# Altium PCB 大功率步进电机驱动器.PCBDOC
Units mm, origin at the board's own origin, x right, y up, seen from the top; angles counter-clockwise.
Board outline 152.4 x 101.6 mm, 2 copper layers (Top Layer, Bottom Layer); 33 components, 26 nets, 96 pads, 9 vias.
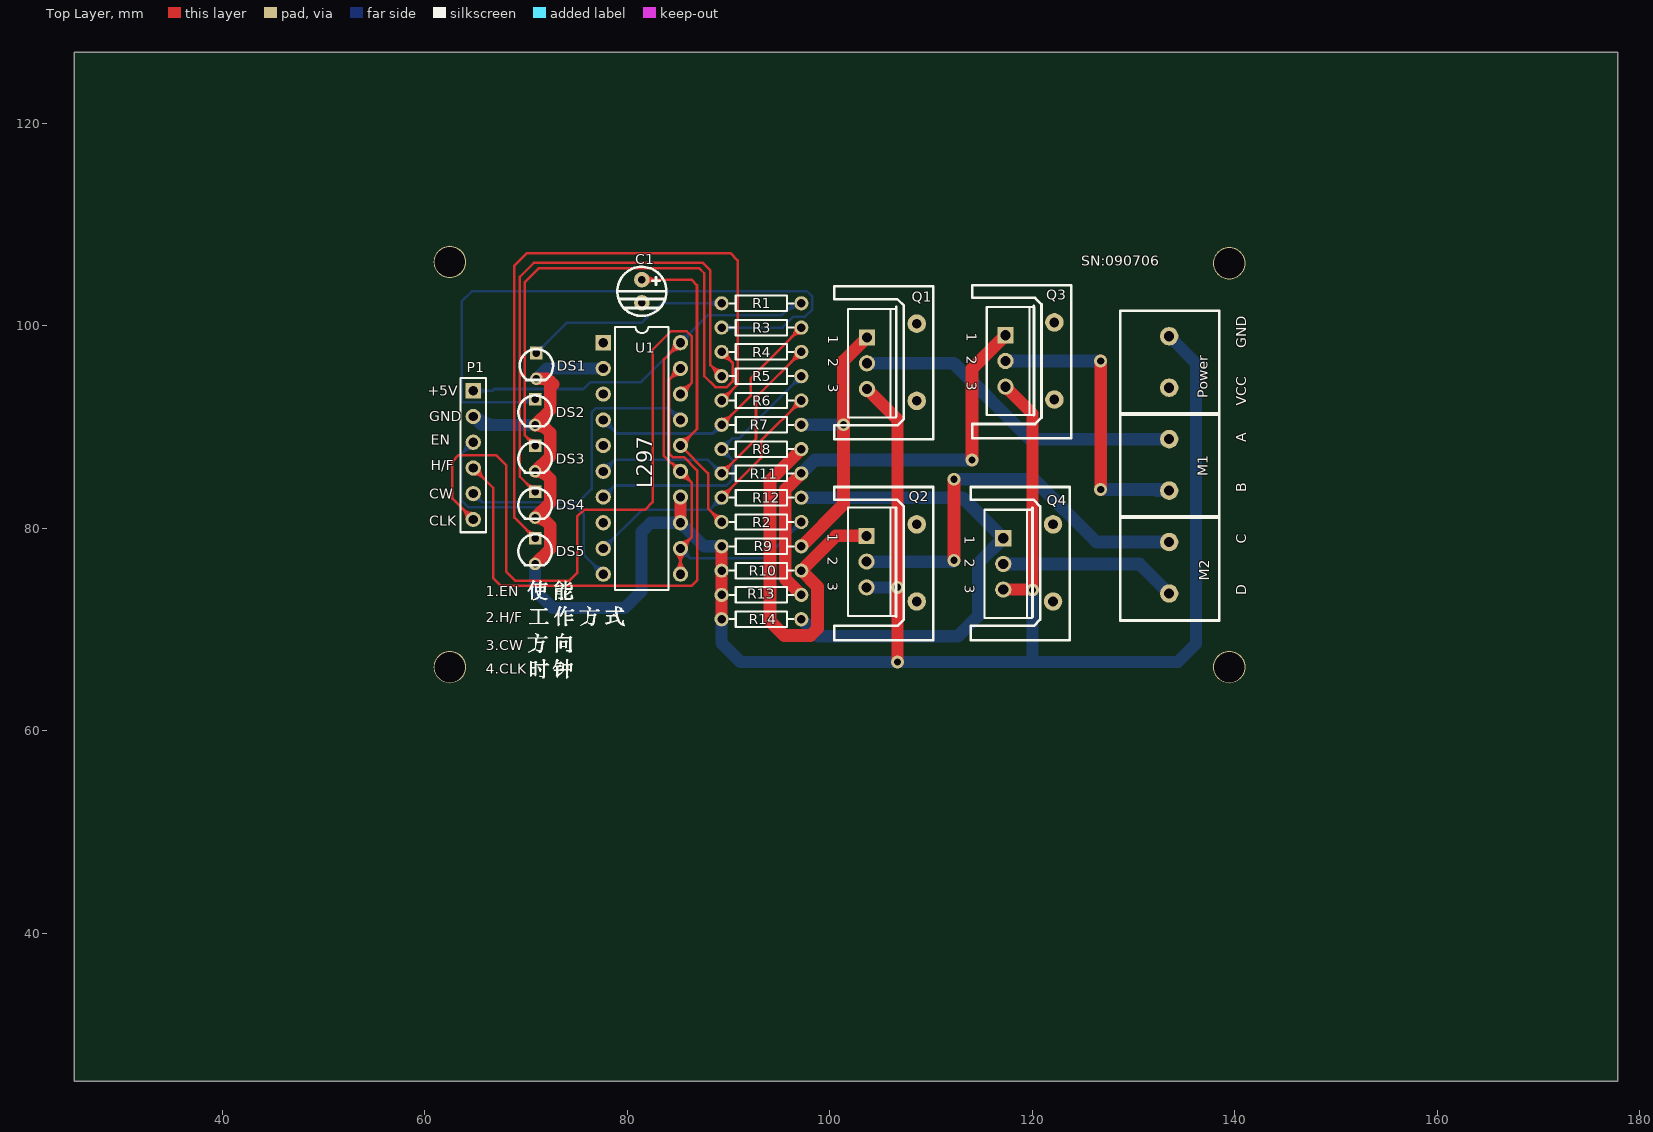
[diagram p0: Top Layer view]
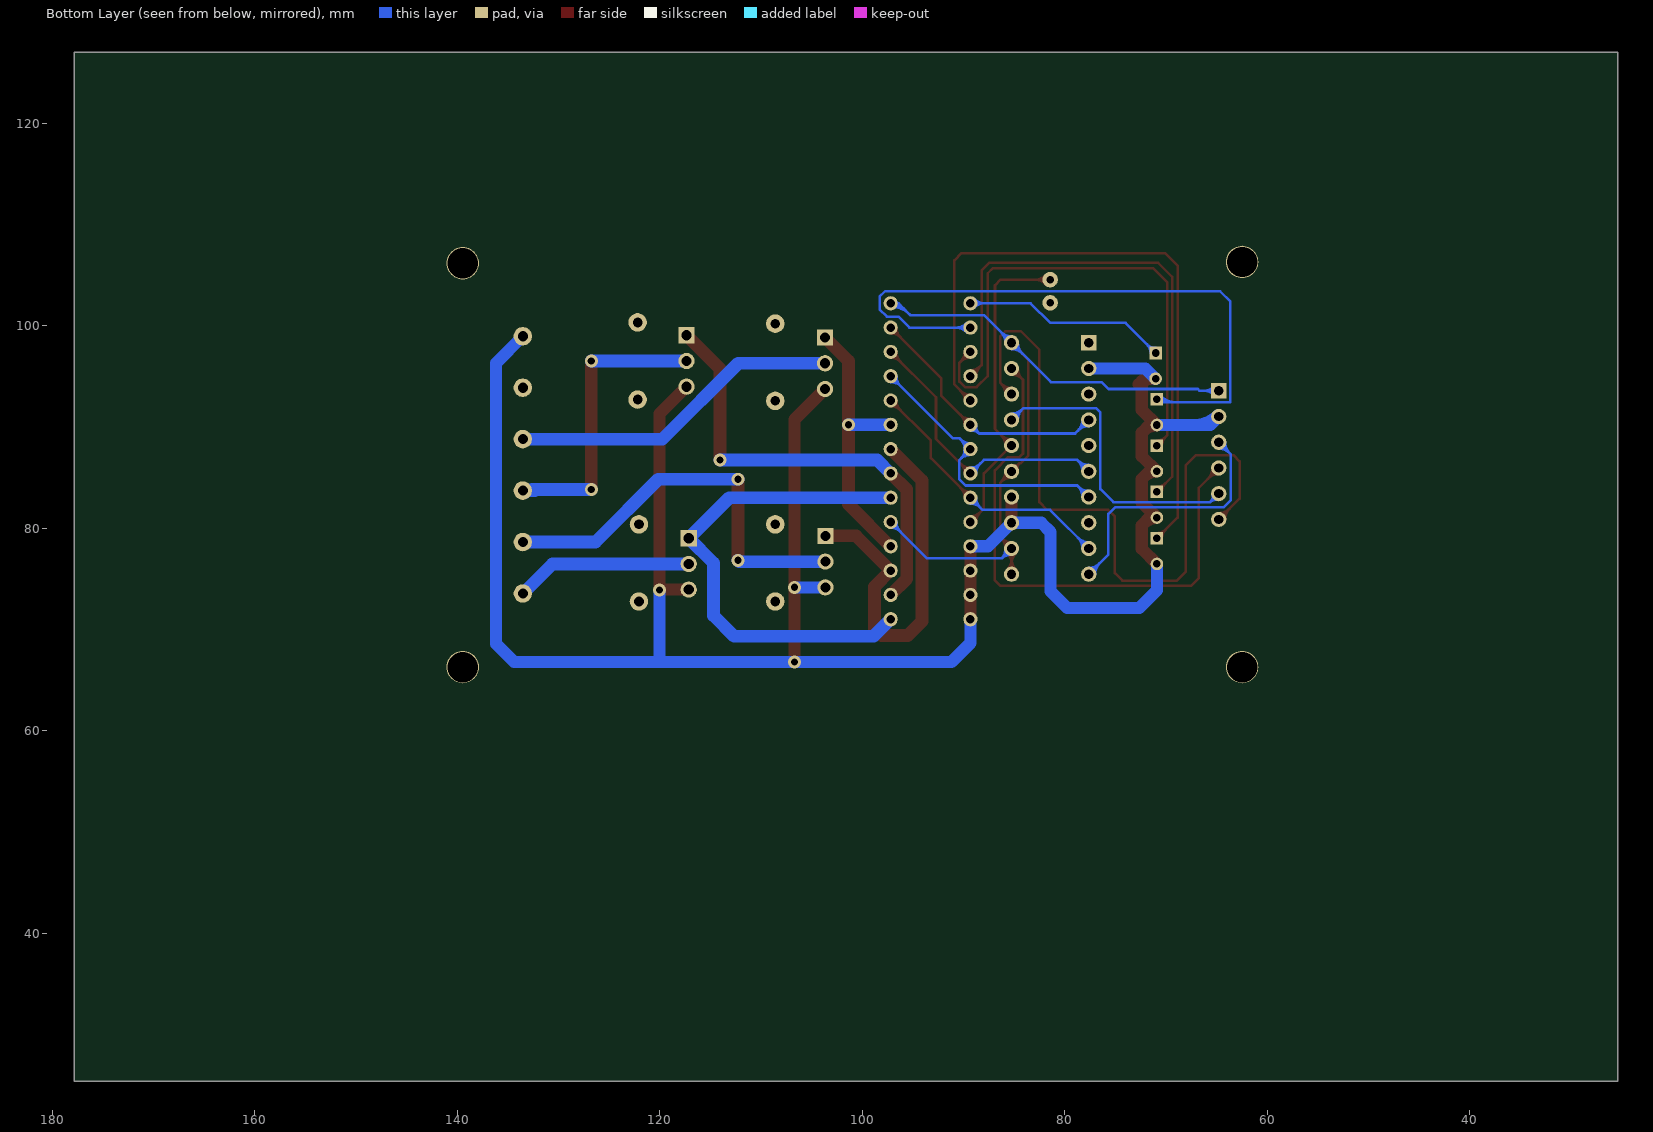
[diagram p1: Bottom Layer view, seen from below]

## Layer stack, top to bottom
Top Layer: signal copper 0.0356
Dielectric: dielectric 0.32, FR-4, Dk 4.8
Bottom Layer: signal copper 0.0356

## Board outline
25.4,25.4 177.8,25.4 177.8,127 25.4,127

## Design rules (kind name [scope] priority, off if disabled: settings)
Clearance [All] p1: gap=0.254
ComponentClearance [All] p1: gap=0.254 collisioncheckmode=3
PolygonConnect [All] p1: connectstyle=Relief reliefconductorwidth=0.254 reliefentries=4 polygonreliefangle="90 Angle"
RoutingVias [All] p1: holewidth=0.711 width=1.27 viastyle="Through Hole" minholewidth=0.711 minwidth=1.27 maxholewidth=0.711 maxwidth=1.27
SolderMaskExpansion [All] p1: expansion=0.102
TestPointUsage [All] p1: valid=0 allowmultiple=FALSE
Testpoint [All] p1: side=15 testpointundercomponent=TRUE minsize=1.016 maxsize=2.54 preferedsize=1.524 minholesize=0 maxholesize=1.016 preferedholesize=0.813 testpointgrid=0.025 style=1023 order=1234567890
Width Width_9 [InNet('NetQ4_1')] p1: maxlimit=1.254 minlimit=1.254 preferedwidth=1.254
Width Width_8 [InNet('NetQ3_1')] p2: maxlimit=1.254 minlimit=1.254 preferedwidth=1.254
Width Width_7 [InNet('NetQ2_1')] p3: maxlimit=1.254 minlimit=1.254 preferedwidth=1.254
Width Width_6 [InNet('NetQ1_1')] p4: maxlimit=1.254 minlimit=1.254 preferedwidth=1.254
Width Width_5 [InNet('NetM2_2')] p5: maxlimit=1.254 minlimit=1.254 preferedwidth=1.254
Width Width_4 [InNet('NetM2_1')] p6: maxlimit=1.254 minlimit=1.254 preferedwidth=1.254
Width Width_3 [InNet('NetM1_2')] p7: maxlimit=1.254 minlimit=1.254 preferedwidth=1.254
Width Width_2 [InNet('NetM1_1')] p8: maxlimit=1.254 minlimit=1.254 preferedwidth=1.254
Width Width_1 [InNet('GND')] p9: maxlimit=1.2 minlimit=1.2 preferedwidth=1.2
Width [All] p10: maxlimit=0.254 minlimit=0.254 preferedwidth=0.254
17 further rules are at their usual default settings.

## Classes and differential pairs
component class 步进电机控制器: C1 C6 DS1 DS2 DS3 DS4 DS5 M1 M2 P1 Power Q1 Q2 Q3 Q4 R1 R2 R3 R4 R5 R6 R7 R8 R9 R10 R11 R12 R13 R14 U1 U2

## Components (designator, comment, footprint, x,y, rotation, side; value= is the part's Value field where it differs from the comment)
C1 "" C-DJ-4 78.902,102.135 r270 top
DS1 "LED" LED_D 72.552,95.531 r270 top
DS2 "LED" LED_D 72.425,90.959 r270 top
DS3 "LED" LED_D 72.425,86.387 r270 top
DS4 "LED" LED_D 72.425,81.815 r270 top
DS5 "LED" LED_D 72.425,77.243 r270 top
M1 "" JK128_2 134.655,88.292 r0 top
M2 "" JK128_2 134.655,78.132 r0 top
P1 "PZ_6" HDR-6 63.662,87.403 r270 top
Power "" JK128_2 134.655,98.452 r0 top (schematic designator "Power 1")
Q1 "NMOS-2" SFM-T3/A4.7V 103.667,96.293 r270 top
Q2 "NMOS-2" SFM-T3/A4.7V 103.632,76.708 r270 top
Q3 "NMOS-2" SFM-T3/A4.7V 117.348,96.52 r270 top
Q4 "NMOS-2" SFM-T3/A4.7V 117.129,76.481 r270 top
R1 "Res" RSE 93.253,102.217 r180 top
R2 "Res" RSE 93.253,80.619 r0 top
R3 "Res" RSE 93.253,99.817 r180 top
R4 "Res" RSE 93.253,97.417 r180 top
R5 "Res" RSE 93.253,95.018 r180 top
R6 "Res" RSE 93.253,92.618 r180 top
R7 "Res" RSE 93.253,90.218 r180 top
R8 "Res" RSE 93.253,87.818 r180 top
R9 "Res" RSE 93.253,78.219 r180 top
R10 "Res" RSE 93.253,75.82 r180 top
R11 "Res" RSE 93.253,85.419 r180 top
R12 "Res" RSE 93.253,83.019 r180 top
R13 "Res" RSE 93.253,73.42 r180 top
R14 "Res" RSE 93.253,71.02 r180 top
U1 "L297A" DIP-20 81.442,86.895 r270 top
? "Comment" SRP 118.237,76.581 r270 top
? "Comment" SRP 104.775,76.581 r270 top
? "Comment" SRP 118.364,96.52 r270 top
? "Comment" SRP 104.775,96.393 r270 top

## Footprints (in the part's own frame and the unit in brackets; to place one, negate y for a bottom-side part, rotate by r counter-clockwise, add the part's x,y. Pads: shape width x height; smd on the part's side, far side on the other; paste and mask are expansions set on the pad)
C-DJ-4 [mil] "电容4mm"
  round 60 hole 30: 1(-95,100) 2(-5,100)
  silkscreen extent -145,5 46,196
DIP-20 [mm] "直插20管脚"
  rect 1.5x1.5 hole 0.9: 1(-11.43,-3.81)
  round 1.5 hole 0.9: 2(-8.89,-3.81) 3(-6.35,-3.81) 4(-3.81,-3.81) 5(-1.27,-3.81) 6(1.27,-3.81) 7(3.81,-3.81) 8(6.35,-3.81) 9(8.89,-3.81) 10(11.43,-3.81) 11(11.43,3.81) 12(8.89,3.81) 13(6.35,3.81) 14(3.81,3.81) 15(1.27,3.81) 16(-1.27,3.81) 17(-3.81,3.81) 18(-6.35,3.81) 19(-8.89,3.81) 20(-11.43,3.81)
  silkscreen extent -13,-2.65 13,2.65
HDR-6 [mm] "6排针"
  rect 1.5x1.5 hole 0.9: 1(-6.175,1.133)
  round 1.5 hole 0.9: 2(-3.635,1.133) 3(-1.095,1.133) 4(1.445,1.133) 5(3.985,1.133) 6(6.525,1.133)
  silkscreen extent -7.45,-0.14 7.79,2.4
JK128_2 [mil] "接线端子"
  round 71.81 hole 39.37: 1(-45,20) 2(-45,-180)
  silkscreen extent -235,-285 150,120
LED_D [mm] "发光二极管_3mm"
  rect 1.25x1.25 hole 0.75: 1(-1.778,-1.524)
  round 1.25 hole 0.75: 2(0.762,-1.524)
  silkscreen extent -2.16,-3.17 0.89,0.13
RSE [mm] "直插电阻1/8W"
  round 1.4 hole 0.85: 1(-3.937,0) 2(3.937,0)
  silkscreen extent -3.18,-0.76 3.17,0.76
SFM-T3/A4.7V [mm] "TO, Thru-Hole, Vertical, Heatsink Mounted; 3 In-Line Leads; Pitch 2.54 mm"
  rect 1.6x1.6 hole 1: 1(-2.54,0)
  round 1.6 hole 1: 2(0,0) 3(2.54,0)
  silkscreen extent -5.35,-1.85 5.35,2.85
SRP [mm] "散热片78XX"
  round 1.824 hole 0.962: 0(-3.81,3.81) 0(3.81,3.81)
  silkscreen extent -7.49,-4.32 7.62,5.46

## Part data
C1: library part Cap, "Capacitor"
DS1 DS2 DS3 DS4 DS5: "发光二极管"
M1 M2 Power: library part MHDR1X2, "Header, 2-Pin"
P1: "排针——6"
Q1 Q2 Q3 Q4: "N-Channel Power MOSFET"
R1 R2 R3 R4 R5 R6 R7 R8 R9 R10 R11 R12 R13 R14: "电阻"
U1: "Stepper Motor Controller"

## Free pads (board coordinates)
  round 3.2 hole 3: 0(62.484,66.294) 0(62.484,106.299) 0(139.446,66.294) 0(139.446,106.172)

## Via types
v1: diameter 1.27, hole 0.711, Top Layer to Bottom Layer, 9 vias

## Nets (pads, with @x,y where several pads share a name; then routed paths per layer and width w, separated by ;. In a path a pad name is that pad's centre, name@x,y a point inside that pad or via, vN(x,y) a via of type N, cw(c..) or ccw(c..) an arc to the next point about the centre after c; other vN are vias at no path point)
+5V: P1.1 R1.1 R2.2 U1.11 U1.12 U1.15 U1.20 | length 118.6
  Top Layer w0.254: U1.20@84.629,98.325 cw(c83.125,98.325) 84.188,97.262 cw(c85.252,96.198) U1.20@85.252,97.702 ; U1.15@84.644,85.761 ccw(c83.941,85.918) 84.45,86.427 ; U1.11@84.811,75.906 ccw(c83.748,76.969) 85.252,76.969 ccw(c86.756,76.969) U1.11@85.692,75.906 ; U1.12@84.811,77.564 cw(c83.748,76.501) 85.252,76.501 cw(c86.756,76.501) U1.12@85.692,77.564 ; U1.20@84.883,98.325 cw(c83.992,98.325) 84.622,97.695 cw(c85.252,97.065) U1.20@85.252,97.956 ; U1.11@84.991,75.726 ccw(c84.361,76.356) 85.252,76.356 ccw(c86.143,76.356) U1.11@85.513,75.726 ; U1.12@84.991,77.744 cw(c84.361,77.114) 85.252,77.114 cw(c86.143,77.114) U1.12@85.513,77.744 ; U1.15@85.116,86.233 cw(c84.959,86.935) 84.45,86.427 ; U1.11 U1.12 86.385,79.139 86.385,84.491 U1.15 84.45,86.427 ; U1.12@85.252,78.374 ccw(c85.252,79.265) 85.882,78.635 ccw(c86.512,78.005) U1.12@85.621,78.005 ; U1.12@85.252,78.628 ccw(c85.252,80.132) 86.315,79.069 ccw(c87.379,78.005) U1.12@85.875,78.005 ; U1.15@85.252,85.002 cw(c85.252,83.498) 86.315,84.562 cw(c87.379,85.625) U1.15@85.875,85.625 ; U1.15@85.252,85.256 cw(c85.252,84.365) 85.882,84.995 cw(c86.512,85.625) U1.15@85.621,85.625 ; U1.20 83.613,96.686 83.613,87.142 84.328,86.427 84.45,86.427
  Bottom Layer w0.254: P1.1 66.675,93.578 66.848,93.751 75.667,93.751 76.352,94.437 81.364,94.437 U1.20 87.942,101.016 95.21,101.016 96.411,102.217 R1.1 ; P1.1@65.056,93.317 cw(c65.686,92.687) 65.686,93.578 cw(c65.686,94.469) P1.1@65.056,93.839 ; P1.1@65.235,93.137 cw(c66.299,92.074) 66.299,93.578 cw(c66.299,95.082) P1.1@65.235,94.019 ; U1.20@84.629,98.325 cw(c83.125,98.325) 84.188,97.262 cw(c85.252,96.198) U1.20@85.252,97.702 ; U1.20@84.883,98.325 cw(c83.992,98.325) 84.622,97.695 cw(c85.252,97.065) U1.20@85.252,97.956 ; U1.12 86.219,77.038 ; U1.20@85.252,98.694 ccw(c85.252,99.585) 85.882,98.955 ccw(c86.512,98.325) U1.20@85.621,98.325 ; U1.20@85.252,98.948 ccw(c85.252,100.452) 86.315,99.389 ccw(c87.379,98.325) U1.20@85.875,98.325 ; U1.12@85.277,77.637 cw(c85.326,76.935) 85.824,77.432 cw(c86.322,77.93) U1.12@85.62,77.979 ; U1.12@85.295,77.384 cw(c85.378,76.198) 86.218,77.038 ; U1.12@85.873,77.962 ccw(c87.059,77.879) 86.218,77.038 ; 95.316,101.122 cw(c97.19,99.249) R1.1@97.19,101.898 ; 95.75,101.555 cw(c97.19,100.116) R1.1@97.19,102.152 ; 96.184,101.989 cw(c97.19,100.983) R1.1@97.19,102.406 ; R2.2@96.617,80.619 cw(c95.233,80.619) 96.212,79.641 cw(c97.19,78.663) R2.2@97.19,80.046 ; R1.1@96.643,102.047 ccw(c96.411,101.975) 96.411,102.217 ccw(c96.411,102.459) R1.1@96.643,102.387 ; R2.2@96.871,80.619 cw(c96.101,80.619) 96.645,80.074 cw(c97.19,79.53) R2.2@97.19,80.3 ; R2.2 93.609,77.038 86.219,77.038
GND: DS1.2 DS2.2 DS3.2 DS4.2 DS5.2 P1.2 Power.1 Q1.3 Q2.3 Q3.3 Q4.3 R9.2 R10.2 R13.2 R14.2 U1.2 U1.13 U1.14 | length 237.3
  Top Layer w1.2: DS5.2 72.39,77.97 72.39,80.291 71.628,81.053 DS4.2 72.39,82.542 72.39,84.863 71.628,85.625 DS3.2 72.39,87.114 72.39,89.435 71.628,90.197 DS2.2 72.39,91.686 72.39,94.515 72.136,94.769 DS1.2 ; DS4.2@70.901,81.028 cw(c70.901,79.212) 72.185,80.496 ; DS3.2@70.901,85.6 cw(c70.901,83.784) 72.185,85.068 ; DS2.2@70.901,90.172 cw(c70.901,88.356) 72.185,89.64 ; DS4.2@70.905,81.028 cw(c71.125,79.823) 71.992,80.689 ; DS3.2@70.905,85.6 cw(c71.125,84.395) 71.992,85.261 ; DS2.2@70.905,90.172 cw(c71.125,88.967) 71.992,89.833 ; DS1.2@71.032,94.744 cw(c71.348,92.873) 72.69,94.215 ; U1.13 U1.14 ; R13.2 R14.2 R10.2 R9.2 ; Q1.3 106.68,90.74 v1(106.68,66.802) ; v1@106.553,74.168 v1@106.68,74.295 ; Q4.3 119.988,73.941 v1(120.015,73.914) 120.015,91.313 Q3.3
  Bottom Layer w1.2: P1.2 65.636,90.197 DS2.2 ; P1.2@64.901,91.144 ccw(c67.187,93.43) 67.187,90.197 ; DS5.2 70.901,73.879 72.644,72.136 79.756,72.136 81.407,73.787 81.407,79.629 82.323,80.545 U1.13 87.577,78.219 R9.2 ; DS1.2 72.044,95.785 U1.2 ; R14.2 89.316,68.672 91.186,66.802 134.366,66.802 136.144,68.58 136.144,96.328 Power.1 ; Q2.3 v1(106.68,74.168) ; 120.015,66.802 v1(120.015,73.914)
GND-12: C1.2
NetC1_1: C1.1 R2.1 U1.16 | length 42.4
  Top Layer w0.254: C1.1 86.333,104.548 86.891,103.99 86.891,89.804 U1.16 87.986,85.431 87.986,81.949 R2.1 ; C1.1@81.711,104.279 cw(c82.362,103.628) 82.362,104.548 cw(c82.362,105.468) C1.1@81.711,104.817 ; C1.1@81.891,104.099 cw(c82.975,103.015) 82.975,104.548 cw(c82.975,106.081) C1.1@81.891,104.997 ; U1.16@85.252,88.534 ccw(c85.252,89.425) 85.882,88.795 ccw(c86.512,88.165) U1.16@85.621,88.165 ; U1.16@85.252,88.788 ccw(c85.252,90.292) 86.315,89.229 ccw(c87.379,88.165) U1.16@85.875,88.165 ; R2.1@88.743,80.619 ccw(c87.359,80.619) 88.338,81.597 ccw(c89.316,82.575) R2.1@89.316,81.192 ; R2.1@88.997,80.619 ccw(c88.227,80.619) 88.771,81.164 ccw(c89.316,81.708) R2.1@89.316,80.938
NetDS1_1: DS1.1 R1.2 | length 25.6
  Bottom Layer w0.254: DS1.1 73.998,100.279 81.425,100.279 83.363,102.217 R1.2 ; DS1.1@71.028,97.807 ccw(c71.028,99.009) 71.878,98.159 ccw(c72.728,97.309) DS1.1@71.526,97.309 ; R1.2@88.911,101.812 ccw(c87.932,100.833) 87.932,102.217 ccw(c87.932,103.6) R1.2@88.911,102.622 ; R1.2@89.09,101.991 ccw(c88.546,101.447) 88.546,102.217 ccw(c88.546,102.987) R1.2@89.09,102.442
NetDS2_1: DS2.1 R3.2 | length 70.8
  Bottom Layer w0.254: 68.959,92.431 ccw(c68.959,94.679) DS2.1@70.549,93.089 ; 69.572,92.431 ccw(c69.572,94.066) DS2.1@70.728,92.91 ; 70.185,92.431 ccw(c70.185,93.453) DS2.1@70.908,92.73 ; DS2.1 70.594,92.431 63.652,92.431 63.652,102.387 64.67,103.405 97.738,103.405 98.273,102.87 98.273,101.6 97.571,100.898 96.428,100.898 95.347,99.817 R3.2 ; R3.2@89.541,99.591 cw(c90.086,99.047) 90.086,99.817 cw(c90.086,100.587) R3.2@89.541,100.043 ; R3.2@89.721,99.412 cw(c90.699,98.434) 90.699,99.817 cw(c90.699,101.2) R3.2@89.721,100.222
NetDS3_1: DS3.1 R4.2 | length 57.3
  Top Layer w0.254: DS3.1@70.403,88.165 ccw(c69.2,88.165) 70.051,89.015 ccw(c70.901,89.865) DS3.1@70.901,88.663 ; DS3.1 69.895,89.171 69.895,104.312 71.274,105.691 87.095,105.691 87.605,105.181 87.605,95.021 88.697,93.929 89.84,93.929 90.399,94.488 90.399,96.334 R4.2 ; R4.2@89.316,96.844 cw(c89.316,95.461) 90.294,96.439 cw(c91.272,97.417) R4.2@89.889,97.417 ; R4.2@89.316,97.098 cw(c89.316,96.328) 89.86,96.873 cw(c90.405,97.417) R4.2@89.635,97.417
NetDS4_1: DS4.1 R5.2 | length 57.7
  Top Layer w0.254: DS4.1@70.403,83.593 ccw(c69.2,83.593) 70.051,84.443 ccw(c70.901,85.293) DS4.1@70.901,84.091 ; DS4.1 69.387,85.107 69.387,104.82 70.766,106.199 87.476,106.199 88.214,105.461 88.214,96.119 R5.2 ; R5.2@88.743,95.018 ccw(c87.359,95.018) 88.338,95.996 ccw(c89.316,96.974) R5.2@89.316,95.591 ; R5.2@88.997,95.018 ccw(c88.227,95.018) 88.771,95.562 ccw(c89.316,96.107) R5.2@89.316,95.337
NetDS5_1: DS5.1 R6.2 | length 70.4
  Top Layer w0.254: DS5.1@70.403,79.021 ccw(c69.2,79.021) 70.051,79.871 ccw(c70.901,80.721) DS5.1@70.901,79.519 ; DS5.1 68.859,81.062 68.859,105.943 70.079,107.163 90.195,107.163 90.907,106.451 90.907,94.209 R6.2 ; R6.2@89.316,92.937 ccw(c89.316,93.707) 89.86,93.162 ccw(c90.405,92.618) R6.2@89.635,92.618 ; R6.2@89.316,93.191 ccw(c89.316,94.574) 90.294,93.596 ccw(c91.272,92.618) R6.2@89.889,92.618
NetM1_1: M1.1 Q1.2 | length 32.9
  Bottom Layer w1.254: Q1.2 112.241,96.293 119.734,88.8 M1.1
NetM1_2: M1.2 Q3.2 | length 30.5
  Top Layer w1.254: v1(126.746,83.82) v1(126.746,96.52)
  Bottom Layer w1.254: Q3.2 v1(126.746,96.52) ; v1(126.746,83.82) 132.236,83.82 132.336,83.72 M1.2 ; 132.582,83.82 cw(c132.582,82.791) 133.31,83.519 ccw(c132.582,82.791) 132.582,83.82
NetM2_1: M2.1 Q2.2 | length 40.5
  Top Layer w1.254: v1(112.268,76.835) v1(112.268,84.836)
  Bottom Layer w1.254: Q2.2 112.141,76.708 v1(112.268,76.835) ; v1(112.268,84.836) 120.142,84.836 126.338,78.64 M2.1
NetM2_2: M2.2 Q4.2 | length 17.6
  Bottom Layer w1.254: Q4.2 130.591,76.481 M2.2
NetQ1_1: Q1.1 R7.1 R9.1 | length 27.5
  Top Layer w1.254: R9.1 101.346,82.376 101.346,96.512 Q1.1
  Bottom Layer w1.254: R7.1 v1(101.346,90.218)
NetQ2_1: Q2.1 R8.1 R10.1 | length 38.1
  Top Layer w1.254: R8.1 94.098,84.726 94.098,70.825 95.504,69.418 98.095,69.418 98.781,70.104 98.781,74.229 R10.1 100.618,79.248 Q2.1
NetQ3_1: Q3.1 R11.1 R13.1 | length 44.4
  Top Layer w1.254: R13.1 95.606,75.004 95.606,83.834 R11.1 ; v1(114.046,86.741) 114.046,95.758 Q3.1
  Bottom Layer w1.254: R11.1 98.512,86.741 v1(114.046,86.741)
NetQ4_1: Q4.1 R12.1 R14.1 | length 49.3
  Bottom Layer w1.254: R14.1 98.868,69.342 112.649,69.342 114.681,71.374 114.681,76.573 Q4.1 113.131,83.019 R12.1
NetR3_1: R3.1 R7.2 U1.4 | length 37.8
  Top Layer w0.254: R7.2 92.202,93.104 92.202,94.829 R3.1 ; R7.2@89.316,90.537 ccw(c89.316,91.307) 89.86,90.763 ccw(c90.405,90.218) R7.2@89.635,90.218 ; R7.2@89.316,90.791 ccw(c89.316,92.174) 90.294,91.196 ccw(c91.272,90.218) R7.2@89.889,90.218 ; R3.1@96.617,99.817 cw(c95.233,99.817) 96.212,98.839 cw(c97.19,97.861) R3.1@97.19,99.244 ; R3.1@96.871,99.817 cw(c96.101,99.817) 96.645,99.272 cw(c97.19,98.728) R3.1@97.19,99.498
  Bottom Layer w0.254: U1.4@77.632,90.082 cw(c77.632,88.578) 78.695,89.642 cw(c79.759,90.705) U1.4@78.255,90.705 ; U1.4@77.632,90.336 cw(c77.632,89.445) 78.262,90.075 cw(c78.892,90.705) U1.4@78.001,90.705 ; U1.4 78.98,89.357 88.455,89.357 ; R7.2@88.745,90.164 cw(c87.743,90.069) 88.455,89.357 ; R7.2@89.262,89.648 ccw(c89.167,88.646) 88.455,89.357 ; R7.2 88.455,89.357
NetR4_1: R4.1 R11.2 U1.6 | length 41.9
  Top Layer w0.254: R11.2 92.71,88.813 92.71,92.938 R4.1 ; R11.2@89.316,85.738 ccw(c89.316,86.508) 89.86,85.963 ccw(c90.405,85.419) R11.2@89.635,85.419 ; R11.2@89.316,85.992 ccw(c89.316,87.375) 90.294,86.397 ccw(c91.272,85.419) R11.2@89.889,85.419 ; R4.1@96.617,97.417 cw(c95.233,97.417) 96.212,96.439 cw(c97.19,95.461) R4.1@97.19,96.844 ; R4.1@96.871,97.417 cw(c96.101,97.417) 96.645,96.873 cw(c97.19,96.328) R4.1@97.19,97.098
  Bottom Layer w0.254: U1.6 78.763,86.756 87.978,86.756 R11.2 ; U1.6@77.632,85.994 ccw(c77.632,86.885) 78.262,86.255 ccw(c78.892,85.625) U1.6@78.001,85.625 ; U1.6@77.632,86.248 ccw(c77.632,87.752) 78.695,86.689 ccw(c79.759,85.625) U1.6@78.255,85.625 ; R11.2@88.743,85.419 ccw(c87.359,85.419) 88.338,86.397 ccw(c89.316,87.375) R11.2@89.316,85.992 ; R11.2@88.997,85.419 ccw(c88.227,85.419) 88.771,85.963 ccw(c89.316,86.508) R11.2@89.316,85.738
NetR5_1: R5.1 R8.2 U1.7 | length 41.7
  Bottom Layer w0.254: U1.7 78.773,84.226 89.789,84.226 90.399,84.836 90.399,86.735 R8.2 90.397,88.9 91.072,88.9 R5.1 ; U1.7@77.632,83.454 ccw(c77.632,84.345) 78.262,83.715 ccw(c78.892,83.085) U1.7@78.001,83.085 ; U1.7@77.632,83.708 ccw(c77.632,85.212) 78.695,84.149 ccw(c79.759,83.085) U1.7@78.255,83.085 ; R8.2@89.316,87.245 cw(c89.316,85.862) 90.294,86.84 cw(c91.272,87.818) 89.889,87.818 cw(c91.272,87.818) 90.294,88.796 cw(c89.316,89.775) R8.2@89.316,88.391 ; R8.2@89.316,87.499 cw(c89.316,86.729) 89.86,87.274 cw(c90.405,87.818) 89.635,87.818 cw(c90.405,87.818) 89.86,88.363 cw(c89.316,88.907) R8.2@89.316,88.137 ; R5.1@96.617,95.018 cw(c95.233,95.018) 96.212,94.039 cw(c97.19,93.061) R5.1@97.19,94.445 ; R5.1@96.871,95.018 cw(c96.101,95.018) 96.645,94.473 cw(c97.19,93.928) R5.1@97.19,94.699
NetR6_1: R6.1 R12.2 U1.9 | length 40.5
  Top Layer w0.254: R12.2 93.218,86.921 93.218,88.646 R6.1 ; R12.2@89.316,83.338 ccw(c89.316,84.108) 89.86,83.563 ccw(c90.405,83.019) R12.2@89.635,83.019 ; R12.2@89.316,83.592 ccw(c89.316,84.975) 90.294,83.997 ccw(c91.272,83.019) R12.2@89.889,83.019 ; R6.1@96.617,92.618 cw(c95.233,92.618) 96.212,91.64 cw(c97.19,90.661) R6.1@97.19,92.045 ; R6.1@96.871,92.618 cw(c96.101,92.618) 96.645,92.073 cw(c97.19,91.529) R6.1@97.19,92.299
  Bottom Layer w0.254: U1.9 81.44,81.813 88.11,81.813 R12.2 ; U1.9@77.632,78.374 ccw(c77.632,79.265) 78.262,78.635 ccw(c78.892,78.005) U1.9@78.001,78.005 ; U1.9@77.632,78.628 ccw(c77.632,80.132) 78.695,79.069 ccw(c79.759,78.005) U1.9@78.255,78.005 ; R12.2@88.743,83.019 cw(c87.359,83.019) 88.338,82.041 cw(c89.316,81.062) R12.2@89.316,82.446 ; R12.2@88.997,83.019 cw(c88.227,83.019) 88.771,82.474 cw(c89.316,81.93) R12.2@89.316,82.7
VCC: Power.2
使能: P1.3 U1.10 | length 33.1
  Bottom Layer w0.254: P1.3@64.172,88.498 cw(c62.668,88.498) 63.731,87.434 cw(c64.795,86.371) P1.3@64.795,87.875 ; P1.3@64.426,88.498 cw(c63.535,88.498) 64.165,87.868 cw(c64.795,87.238) P1.3@64.795,88.129 ; P1.3 63.602,87.305 63.602,82.804 64.338,82.067 75.032,82.067 75.692,81.407 75.692,77.405 U1.10 ; U1.10@77.009,75.465 ccw(c75.505,75.465) 76.568,76.529 ccw(c77.632,77.592) U1.10@77.632,76.088 ; U1.10@77.263,75.465 ccw(c76.372,75.465) 77.002,76.095 ccw(c77.632,76.725) U1.10@77.632,75.834
工作方式: P1.4 U1.19 | length 63.1
  Top Layer w0.254: P1.4@64.795,85.335 cw(c64.795,83.831) 65.858,84.894 cw(c66.922,85.958) P1.4@65.418,85.958 ; P1.4@64.795,85.589 cw(c64.795,84.698) 65.425,85.328 cw(c66.055,85.958) P1.4@65.164,85.958 ; P1.4 66.751,84.002 66.751,75.108 67.539,74.32 86.36,74.32 86.893,74.854 86.893,85.725 85.598,87.02 84.476,87.02 84.121,87.376 84.121,94.654 U1.19 ; U1.19@84.629,95.785 cw(c83.125,95.785) 84.188,94.722 cw(c85.252,93.658) U1.19@85.252,95.162 ; U1.19@84.883,95.785 cw(c83.992,95.785) 84.622,95.155 cw(c85.252,94.525) U1.19@85.252,95.416
方向: P1.5 U1.17 | length 34.9
  Bottom Layer w0.254: P1.5 65.637,82.575 ; P1.5@64.905,82.805 cw(c65.052,81.99) 65.637,82.575 ; P1.5@65.408,83.308 ccw(c66.223,83.161) 65.637,82.575 ; U1.17@84.629,90.705 ccw(c83.125,90.705) 84.188,91.769 ccw(c85.252,92.832) U1.17@85.252,91.328 ; U1.17@84.883,90.705 ccw(c83.992,90.705) 84.622,91.335 ccw(c85.252,91.965) U1.17@85.252,91.074 ; U1.17 84.11,91.846 76.886,91.846 76.479,91.44 76.479,83.871 75.184,82.575 65.637,82.575
时钟: P1.6 U1.18 | length 78
  Top Layer w0.254: P1.6@64.172,80.878 ccw(c62.668,80.878) 63.731,81.942 ccw(c64.795,83.005) P1.6@64.795,81.501 ; P1.6@64.426,80.878 ccw(c63.535,80.878) 64.165,81.508 ccw(c64.795,82.138) P1.6@64.795,81.247 ; P1.6 62.738,82.935 62.738,86.614 63.348,87.224 67.056,87.224 68.072,86.208 68.072,75.692 68.936,74.828 74.32,74.828 75.057,75.565 75.057,81.153 75.717,81.813 81.737,81.813 82.499,82.575 82.499,97.627 84.328,99.456 85.852,99.456 86.383,98.925 86.383,94.376 U1.18 ; U1.18@85.252,93.614 ccw(c85.252,94.505) 85.882,93.875 ccw(c86.512,93.245) U1.18@85.621,93.245 ; U1.18@85.252,93.868 ccw(c85.252,95.372) 86.315,94.309 ccw(c87.379,93.245) U1.18@85.875,93.245
pads on no net: ?.0 U1.1 U1.3 U1.5 U1.8

## Silkscreen, mask and mechanical layers (free items; w line width, h text height)
Top Overlay:
  drawing of 1264 lines, arcs and shapes, not listed
  text "SN:090706" at 124.841,105.918 h1.02
  text "GND" at 141.097,97.79 h1.02 r90
  text "+5V" at 60.325,93.091 h1.02
  text "VCC" at 141.097,92.075 h1.02 r90
  text "GND" at 60.452,90.551 h1.02
  text "A" at 141.097,88.519 h1.02 r90
  text "EN" at 60.579,88.265 h1.02
  text "H/F" at 60.579,85.725 h1.02
  text "L297" at 82.458,83.974 h1.52 r90
  text "B" at 141.097,83.566 h1.02 r90
  text "CW" at 60.452,82.931 h1.02
  text "CLK" at 60.452,80.264 h1.02
  text "C" at 141.097,78.486 h1.02 r90
  text "D" at 141.097,73.406 h1.02 r90
  text "1.EN" at 66.04,73.279 h1.02
  text "2.H/F" at 66.04,70.739 h1.02
  text "3.CW" at 66.04,67.945 h1.02
  text "4.CLK" at 66.04,65.659 h1.02
Mechanical 1:
  lines w0.254: 59.817,64.643 59.817,107.823 59.817,107.95 60.833,108.966 140.843,108.966 142.113,107.696 142.113,64.77 140.97,63.627 60.833,63.627 59.817,64.643

## Text inside footprints (layer, text, board x,y; h text height)
Q1: Top Overlay "2" at 99.842,96.793 h1.02 r270; Top Overlay "1" at 99.842,99.083 h1.02 r270; Top Overlay "3" at 99.842,94.253 h1.02 r270
Q2: Top Overlay "2" at 99.807,77.208 h1.02 r270; Top Overlay "1" at 99.807,79.498 h1.02 r270; Top Overlay "3" at 99.807,74.668 h1.02 r270
Q3: Top Overlay "2" at 113.523,97.02 h1.02 r270; Top Overlay "1" at 113.523,99.31 h1.02 r270; Top Overlay "3" at 113.523,94.48 h1.02 r270
Q4: Top Overlay "2" at 113.304,76.981 h1.02 r270; Top Overlay "1" at 113.304,79.271 h1.02 r270; Top Overlay "3" at 113.304,74.441 h1.02 r270